# Altium PCB Power_981228.PcbDoc
Units mil, origin at the board's own origin, x right, y up, seen from the top; angles counter-clockwise.
Board outline 6000 x 4000 mil, 2 copper layers (Top Layer, Bottom Layer); 34 components, 31 nets, 135 pads, 0 vias.
Unrouted connection lines stored in the file: 59.
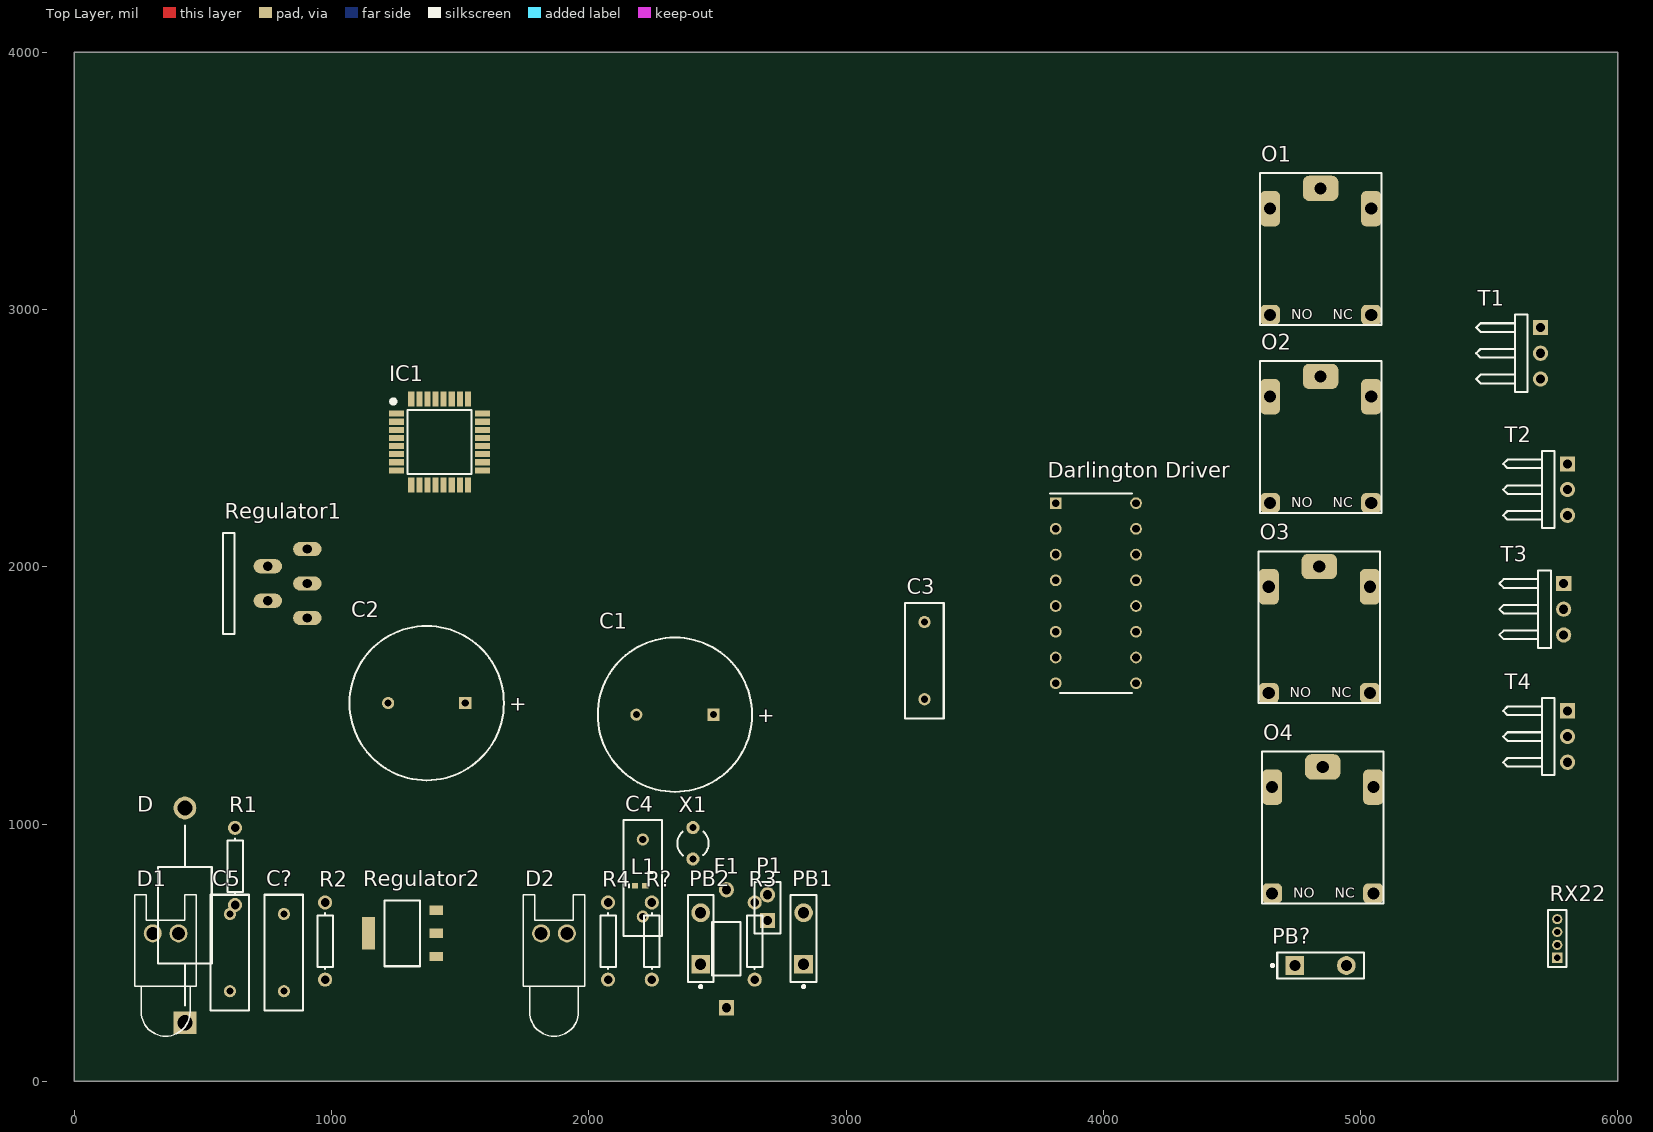
[diagram p0: Top Layer view]
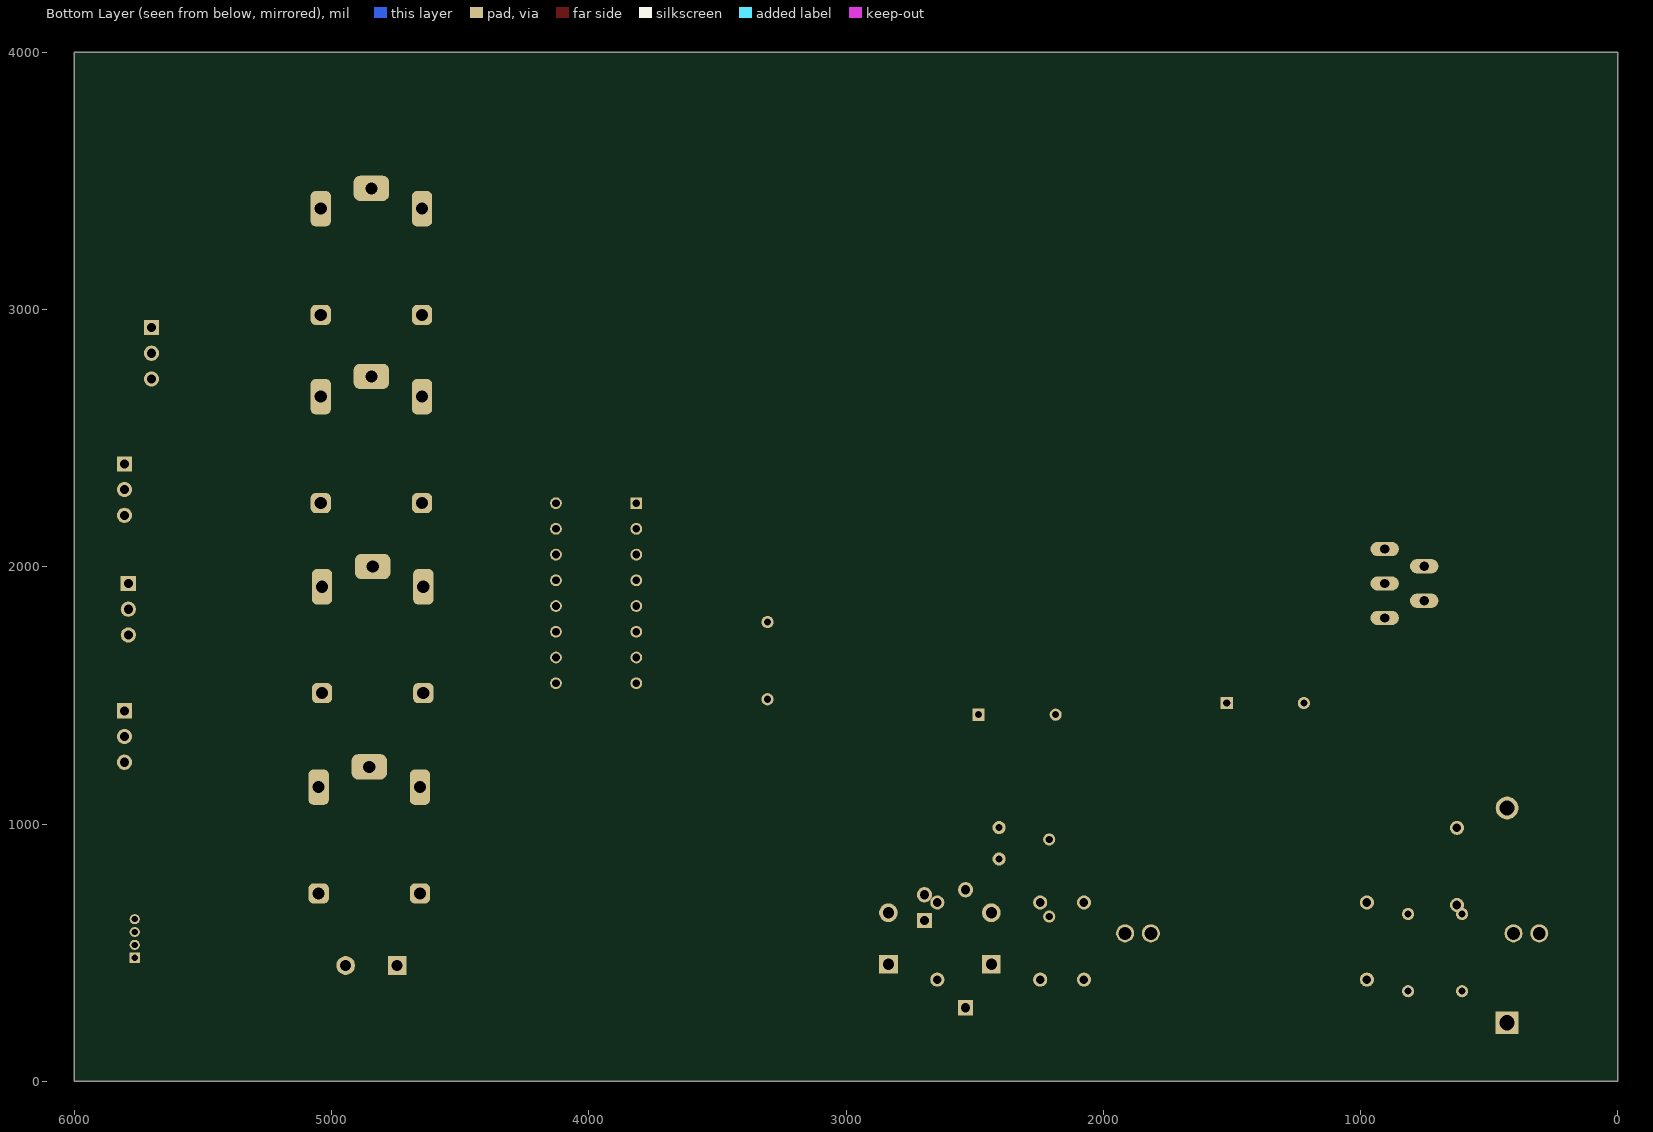
[diagram p1: Bottom Layer view, seen from below]

## Layer stack, top to bottom
Top Solder: solder mask 0.4, Solder Resist, Dk 3.5
Top Layer: signal copper 1.4
Dielectric 1: dielectric 12.6, FR-4, Dk 4.8
Bottom Layer: signal copper 1.4
Bottom Solder: solder mask 0.4, Solder Resist, Dk 3.5

## Board outline
0,0 6000,0 6000,4000 0,4000

## Design rules (kind name [scope] priority, off if disabled: settings)
Clearance [All] p1: gap=10 ignorepadtopadclearanceinfootprint=FALSE except(0: Arc-Hole Track-Hole SMDPad-Hole THPad-Hole Via-Hole Fill-Hole Poly-Hole Region-Hole Text-Hole)
PolygonConnect [All] p1: connectstyle=Relief reliefconductorwidth=10 reliefentries=4 polygonreliefangle="90 Angle" airgapwidth=10
RoomDefinition Power_981228 [InComponentClass('Power_981228')] p1: confinementstyle=ConfineIn formatcopy=TRUE lockcomponents=FALSE outline 6045,60 8575,60 8575,780 6045,780
RoutingVias [All] p1: holewidth=28 width=50 viastyle="Through Hole" minholewidth=28 minwidth=50 maxholewidth=28 maxwidth=50
SolderMaskExpansion [All] p1: expansion=4
Width [All] p1: maxlimit=10 minlimit=10 preferedwidth=10
30 further rules are at their usual default settings.

## Components (designator, comment, footprint, x,y, rotation, side; value= is the part's Value field where it differs from the comment)
C1 "Cap Pol1" RB7.6-15 2335,1425 r0 top value=100uF
C2 "Cap Pol1" RB7.6-15 1370,1470 r0 top value=1000uF
C3 "Cap" RAD-0.3 3305,1635 r90 top value=20pF
C4 "Cap" RAD-0.3 2210,790 r90 top value=20pF
C5 "Cap" RAD-0.3 605,500 r90 top value=10pF
C? "Cap" RAD-0.3 815,500 r90 top
D "1N5822" DIOAD2120W130L950D530P 430,645 r90 top
D1 "LED0" LED-0 355,575 r0 top
D2 "LED0" LED-0 1865,575 r0 top
"Darlington Driver" "ULN2003A" DIP794W56P254L1918H533Q16N 3971.3,1897.32 r0 top
F1 "Fuse 1" PIN-W2/E2.8 2535,515 r90 top
IC1 "STM8S903K3T6C" QFP80P900X900X160-32N 1420,2485 r0 top
L1 "Inductor" 0402-A 2200,760 r0 top value=100uH
O1 "12V SMALL" Relay_5_Small 4845,3225 r0 top
O2 "12V SMALL" Relay_5_Small 4845,2493.94 r0 top
O3 "12V SMALL" Relay_5_Small 4840,1755 r0 top
O4 "12V SMALL" Relay_5_Small 4853.15,976.06 r0 top
P1 "HeaderIn" HDR1X2 2695,625 r90 top
PB1 "SW-PB" SPST-2 2835,555 r90 top
PB2 "SW-PB" SPST-2 2435,555 r90 top
PB? "SW-PB" SPST-2 4845,450 r0 top
R1 "Res1" AXIAL-0.3 625,835 r90 top value=1K
R2 "Res1" AXIAL-0.3 975,545 r90 top value=1K
R3 "Res1" AXIAL-0.3 2645,545 r90 top value=10K
R4 "Res1" AXIAL-0.3 2075,545 r90 top value=10K
R? "Res1" AXIAL-0.3 2245,545 r90 top value=10K
Regulator1 "LM2576" TO220-5 575,1935 r90 top
Regulator2 "AMS1117-3.3" SOT229P700X180-4N 1275,575 r90 top
RX22 "MHDR1X4" MHDR1X4 5765,480 r90 top
T1 "Header 3H" HDR1X3H 5700,2930 r270 top (schematic designator T4)
T2 "Header 3H" HDR1X3H 5805,2400 r270 top (schematic designator T3)
T3 "Header 3H" HDR1X3H 5790,1935 r270 top (schematic designator T2)
T4 "Header 3H" HDR1X3H 5805,1440 r270 top (schematic designator T1)
X1 "8MHz" R38 2405,925 r0 top

## Footprints (in the part's own frame and the unit in brackets; to place one, negate y for a bottom-side part, rotate by r counter-clockwise, add the part's x,y. Pads: shape width x height; smd on the part's side, far side on the other; paste and mask are expansions set on the pad)
0402-A [mm] "Chip Inductor, Body 1.0x0.5mm, IPC High Density"
  rect 0.6x0.5 smd: 1(-0.5,0) 2(0.5,0)
  silkscreen extent -1.1,-0.15 -1.1,0.15, body extent -0.55,-0.3 0.55,0.3, height 0.55
AXIAL-0.3 [mm] "Axial Device, Thru-Hole; 2 Leads; 0.3 in Pin Spacing"
  round 1.4 hole 0.85: 1(-3.81,0) 2(3.81,0)
  silkscreen extent -2.77,-0.76 2.77,0.76
DIOAD2120W130L950D530P [mm]
  round 2.25 hole 1.5: A(10.6,0)
  rect 2.25x2.25 hole 1.5: C(-10.6,0)
  silkscreen extent -8.89,-2.65 8.89,2.65
DIP794W56P254L1918H533Q16N [mm]
  rect 1.16x1.16 hole 0.76: 1(-3.97,8.89)
  round 1.16 hole 0.76: 2(-3.97,6.35) 3(-3.97,3.81) 4(-3.97,1.27) 5(-3.97,-1.27) 6(-3.97,-3.81) 7(-3.97,-6.35) 8(-3.97,-8.89) 9(3.97,-8.89) 10(3.97,-6.35) 11(3.97,-3.81) 12(3.97,-1.27) 13(3.97,1.27) 14(3.97,3.81) 15(3.97,6.35) 16(3.97,8.89)
  silkscreen extent -4.55,-9.84 3.55,9.84, body extent -4.11,-9.59 4.11,9.59, height 5.33
HDR1X2 [mm] "Connector; Header; 2 Position"
  rect 1.5x1.5 hole 0.9: 1(0,0)
  round 1.5 hole 0.9: 2(2.54,0)
  silkscreen extent -1.27,-1.27 3.81,1.27
HDR1X3H [mm] "Connector; Header; 3 Position; Right Angle"
  rect 1.5x1.5 hole 0.9: 1(0,0)
  round 1.5 hole 0.9: 2(2.54,0) 3(5.08,0)
  silkscreen extent -1.27,-6.35 6.35,-1.27
LED-0 [mil] "LED; 2 Leads"
  round 70 hole 50: 1(50,0) 2(-50,0)
  silkscreen extent -120,-400 120,150
MHDR1X4 [mm] "Connector; Header; 4 Position"
  rect 1x1 hole 0.6: 1(0,0)
  round 1 hole 0.6: 2(1.27,0) 3(2.54,0) 4(3.81,0)
  silkscreen extent -0.9,-0.9 4.71,0.9
PIN-W2/E2.8 [mm] "Thru-Hole; 2 Leads"
  rect 1.5x1.5 hole 0.9: 1(-5.825,0)
  round 1.5 hole 0.9: 2(5.825,0)
  silkscreen extent -2.65,-1.4 2.65,1.4
QFP80P900X900X160-32N [mm]
  rect 1.475x0.6 smd: 1(-4.238,2.8) 2(-4.238,2) 3(-4.238,1.2) 4(-4.238,0.4) 5(-4.238,-0.4) 6(-4.238,-1.2) 7(-4.238,-2) 8(-4.238,-2.8) 17(4.238,-2.8) 18(4.238,-2) 19(4.238,-1.2) 20(4.238,-0.4) 21(4.238,0.4) 22(4.238,1.2) 23(4.238,2) 24(4.238,2.8)
  rect 0.6x1.475 smd: 9(-2.8,-4.238) 10(-2,-4.238) 11(-1.2,-4.238) 12(-0.4,-4.238) 13(0.4,-4.238) 14(1.2,-4.238) 15(2,-4.238) 16(2.8,-4.238) 25(2.8,4.238) 26(2,4.238) 27(1.2,4.238) 28(0.4,4.238) 29(-0.4,4.238) 30(-1.2,4.238) 31(-2,4.238) 32(-2.8,4.238)
  silkscreen extent -4.77,-3.15 3.15,4.2, body extent -4.5,-4.5 4.5,4.5, height 1.6
R38 [mm] "Crystal, Thru-Hole; 2 Leads; Body 3.1 x 8.2 mm (Dia.xH)"
  round 1.3 hole 0.7: 1(0,1.55) 2(0,-1.55)
  silkscreen extent -1.55,-1.19 1.55,1.17
RAD-0.3 [mm] "Radial Cap, Thru-Hole; 2 Leads; 0.3 in Pin Spacing"
  round 1.2 hole 0.7: 1(-3.81,0) 2(3.81,0)
  silkscreen extent -5.71,-1.91 5.71,1.91
RB7.6-15 [mm] "Polarized Capacitor (Radial); 2 Leads"
  rect 1.2x1.2 hole 0.7: 1(3.81,0)
  round 1.2 hole 0.7: 2(-3.81,0)
  silkscreen extent -7.62,-7.62 7.62,7.62
Relay_5_Small [mm]
  rrect50% 2x3.5 hole 1.2: 1(5,4.25) 2(-5,4.25)
  rrect50% 3.5x2.5 hole 1.2: Com(0,6.25)
  rrect50% 2x2 hole 1.2: NC(5,-6.25) NO(-5,-6.25)
  silkscreen extent -6,-7.25 6,7.75, body extent -6.13,-7.58 6.17,8.12, height 13.71
SOT229P700X180-4N [mm]
  rect 0.93x1.31 smd: 1(-2.285,-3.345) 2(0.005,-3.345) 3(2.295,-3.345)
  rect 3.24x1.31 smd: 4(0.005,3.345)
  silkscreen extent -3.25,-1.75 3.25,1.75
SPST-2 [mm] "Switch; 2 Leads"
  rect 1.85x1.85 hole 1.1: 1(-2.54,0)
  round 1.85 hole 1.1: 2(2.54,0)
  silkscreen extent -4.89,-1.27 4.28,1.27
TO220-5 [mm]
  oval 1.408x2.816 hole 0.9: 1(-3.4,-8.4) 2(-1.7,-4.5) 3(0,-8.4) 4(1.7,-4.5) 5(3.4,-8.4)
  silkscreen extent -5,-1.2 5,-0.1

## Part data
C1 C2: "Polarized Capacitor (Radial)", LatestRevisionDate=17-Jul-2002, LatestRevisionNote="Re-released for DXP Platform.", PackageDescription="Polarized Capacitor (Radial); 2 Leads", PackageReference=RB7.6-15, Published=8-Jun-2000, Publisher="Altium Limited"
C3 C4 C5 C?: "Capacitor", LatestRevisionDate=17-Jul-2002, LatestRevisionNote="Re-released for DXP Platform.", PackageDescription="Radial Cap, Thru-Hole; 2 Leads; 0.3 in Pin Spacing", PackageReference=RAD-0.3, Published=8-Jun-2000, Publisher="Altium Limited"
D: "Diode Schottky 40V 3A Through Hole", Package="DO-201AD-201 Panjit", Availability=Unavailable, MF="ON Semiconductor", MP=1N5822, Price=None, SnapEDA_Link=https://www.snapeda.com/parts/1N5822/ON%20Semiconductor/view-part/1356736/?ref=snap
D1 D2: "Typical INFRARED GaAs LED", LatestRevisionDate=08-Jul-2005, LatestRevisionNote="Mech Layer 1 removed.", PackageDescription="LED; 2 Leads", PackageReference=LED-0, Published=8-Jun-2000, Publisher="Altium Limited"
"Darlington Driver": "Integrated Circuit", Manufacturer_Name=STMicroelectronics, Mouser Part Number=511-ULN2003A, RS Part Number=6868209, Allied_Number=70014189, Allied Price/Stock=http://www.alliedelec.com/stmicroelectronics-uln2003a/70014189/, Datasheet Link=http://www.st.com/web/en/resource/technical/document/datasheet/CD00001244.pdf, Height=5.33mm, Manufacturer_Part_Number=ULN2003A, Mouser Price/Stock=https://www.mouser.com/Search/Refine.aspx?Keyword=511-ULN2003A, RS Price/Stock=http://uk.rs-online.com/web/p/products/6868209
F1: "Fuse", LatestRevisionDate=17-Jul-2002, LatestRevisionNote="Re-released for DXP Platform.", PackageDescription="Thru-Hole; 2 Leads", PackageReference=PIN-W2/E2.8, Published=8-Jun-2000, Publisher="Altium Limited"
IC1: "Integrated Circuit", Manufacturer_Name=STMicroelectronics, Mouser Part Number=511-STM8S903K3T6C, RS Part Number=7250025P, Allied_Number=70391238, Allied Price/Stock=http://www.alliedelec.com/stmicroelectronics-stm8s903k3t6c/70391238/, Datasheet Link=http://www.st.com/st-web-ui/static/active/en/resource/technical/document/datasheet/CD00231332.pdf, Height=1.6mm, Manufacturer_Part_Number=STM8S903K3T6C, Mouser Price/Stock=https://www.mouser.com/Search/Refine.aspx?Keyword=511-STM8S903K3T6C, RS Price/Stock=http://china.rs-online.com/web/p/products/7250025P
O1: library part HJR-78F-12VDC-S-Z, Case/Package=LQFP, Frequency=16MHz, Manufacturer=TIANBO, Manufacturer Part Number=STM8S003K3T6C, Max Operating Temperature=85°C, Max Power Dissipation=330mW, Max Supply Voltage=5.5V, Min Operating Temperature=-40°C, Min Supply Voltage=2.95V, Operating Temp="-40°C to +85°C", Package Quantity=250, Rating="7A, 120VAC", Storage Temp="-40°C to +105°C", ComponentLink2Description=http://www.st.com/web/en/resource/technical/document/datasheet/DM00024550.pdf?src-supplier=Future+Electronics, ComponentLink2URL=http://www.st.com/web/en/resource/technical/document/datasheet/DM00024550.pdf?src-supplier=Future+Electronics, ComponentLink3Description=http://www.st.com/web/en/resource/technical/document/datasheet/DM00024550.pdf?src-supplier=Avnet+Europe, ComponentLink3URL=http://www.st.com/web/en/resource/technical/document/datasheet/DM00024550.pdf?src-supplier=Avnet+Europe, ComponentLink4Description=http://www.st.com/web/en/resource/technical/document/datasheet/DM00024550.pdf?src-supplier=Mouser, ComponentLink4URL=http://www.st.com/web/en/resource/technical/document/datasheet/DM00024550.pdf?src-supplier=Mouser, Data Bus Width=8b, Data Rate=8Mbps, Height=1.45mm, Interface=I2C,SPI,IrDA,UART,USART,LIN, Lead Free="Lead Free", Length=7.2mm, Manufacture Part #=HJR-78F-12VDC-S-Z, Max Frequency=16MHz, Memory Size=8KB, Memory Type=FLASH, Mount="Surface Mount", Number of ADC Channels=5, Number of I2C Channels=1, Number of I/Os=28, Number of Pins=32, Number of Programmable I/O=28, Number of SPI Channels=1, Number of Timers/Counters=7, Number of UART Channels=1, Oscillator Type=Internal, Packaging=Tray, Peripherals="Brown-out Detect/Reset,POR,PWM,WDT,I2C", Radiation Hardening=No, RAM Size=1KB, REACH SVHC="No SVHC", Stock 1=0, Supplier 1="Future Electronics", Watchdog Timer=Yes, Width=7.2mm
O2 O3 O4: library part HJR-78F-12VDC-S-Z, Manufacturer=TIANBO, Operating Temp="-40°C to +85°C", Rating="7A, 120VAC", Storage Temp="-40°C to +105°C", Manufacture Part #=HJR-78F-12VDC-S-Z
P1: library part "Header 2", "Header, 2-Pin", LatestRevisionDate=17-Jul-2002, LatestRevisionNote="Re-released for DXP Platform.", Publisher="Altium Limited"
PB1 PB2 PB?: "Switch", LatestRevisionDate=17-Jul-2002, LatestRevisionNote="Re-released for DXP Platform.", PackageDescription="Switch; 2 Leads", PackageReference=SPST-2, Published=24-Mar-1999, Publisher="Altium Limited"
R1 R2 R3 R4 R?: "Resistor", LatestRevisionDate=17-Jul-2002, LatestRevisionNote="Re-released for DXP Platform.", PackageDescription="Axial Device, Thru-Hole; 2 Leads; 0.3 in Pin Spacing", PackageReference=AXIAL-0.3, Published=8-Jun-2000, Publisher="Altium Limited"
Regulator1: "Buck Switching Regulator IC Positive Fixed 5V 1 Output 3A TO-263-6, D²Pak _5 Leads + Tab_, TO-263BA", Package="TO-263-6 National Semiconductor", Availability=Unavailable, MF="Texas Instruments", MP=LM2576, Price=None, SnapEDA_Link=https://www.snapeda.com/parts/LM2576/Texas%20Instruments/view-part/214937/?ref=snap
Regulator2: library part AMS1117, "Low-dropout regulator", Type=AMS1117-3.3
RX22: "Header, 4-Pin", LatestRevisionDate=17-Jul-2002, LatestRevisionNote="Re-released for DXP Platform.", Publisher="Altium Limited"
T1 T2 T3 T4: "Header, 3-Pin, Right Angle", LatestRevisionDate=17-Jul-2002, LatestRevisionNote="Re-released for DXP Platform.", Publisher="Altium Limited"
X1: library part XTAL, "Crystal Oscillator", LatestRevisionDate=17-Jul-2002, LatestRevisionNote="Re-released for DXP Platform.", PackageDescription="Crystal, Thru-Hole; 2 Leads; Body 3.1 x 8.2 mm (Dia.xH)", PackageReference=R38, Published=8-Jun-2000, Publisher="Altium Limited"
L1: Code_IEC=1005, Code_JEITA=0402, LatestRevisionDate=29-May-2009, LatestRevisionNote="IPC-7351 Footprint Added.", PackageDescription="Chip Inductor", PackageReference=0402-A, Published=8-Jun-2000, Publisher="Altium Limited"

## Nets (pads, with @x,y where several pads share a name; then routed paths per layer and width w, separated by ;. In a path a pad name is that pad's centre, name@x,y a point inside that pad or via, vN(x,y) a via of type N, cw(c..) or ccw(c..) an arc to the next point about the centre after c; other vN are vias at no path point)
1: R?.1
3.3V: IC1.6 PB1.2 PB2.2 PB?.2
5V: "Darlington Driver.9" C2.1 L1.2 O1.1 O2.1 O3.1 O4.1 R1.1 Regulator1.4 Regulator2.3 RX22.4
12V: C1.1 F1.1 P1.2
GND: "Darlington Driver.8" C1.2 C2.2 C3.1 C4.1 C5.2 D1.2 D2.2 D.A IC1.4 P1.1 Regulator1.3 Regulator1.5 Regulator2.1 RX22.1
NetC3_2: C3.2 C4.2 IC1.2 IC1.3 X1.1 X1.2
NetD1_1: D1.1 R1.2
NetD_C: D.C L1.1 Regulator1.2
"NetDarlington Driver_13": "Darlington Driver.13" O4.2
"NetDarlington Driver_14": "Darlington Driver.14" O3.2
"NetDarlington Driver_15": "Darlington Driver.15" O2.2
"NetDarlington Driver_16": "Darlington Driver.16" O1.2
NetF1_2: F1.2 Regulator1.1
NetO3_COM: O3.Com T2.2
NetO3_NC: O3.NC T2.1
NetO3_NO: O3.NO T2.3
NetO4_COM: O4.Com T1.2
NetO4_NC: O4.NC T1.1
NetO4_NO: O4.NO T1.3
NetPB1_1: PB1.1 R3.2
NetPB2_1: PB2.1 R4.2
NetPB?_1: PB?.1 R?.2
NRST: IC1.1
RL1: "Darlington Driver.1" IC1.12
RL2: "Darlington Driver.2" IC1.11
RL3: "Darlington Driver.3" IC1.10
RL4: "Darlington Driver.4" IC1.9
SW01: IC1.16 R3.1
SW02: IC1.15 R4.1
SWIM: IC1.26
VCC: C5.1 R2.1 Regulator2.2
pads on no net: "Darlington Driver.5" "Darlington Driver.6" "Darlington Driver.7" "Darlington Driver.10" "Darlington Driver.11" "Darlington Driver.12" C?.1 C?.2 D2.1 IC1.5 IC1.7 IC1.8 IC1.13 IC1.14 IC1.17 IC1.18 IC1.19 IC1.20 IC1.21 IC1.22 IC1.23 IC1.24 IC1.25 IC1.27 IC1.28 IC1.29 IC1.30 IC1.31 IC1.32 O1.Com O1.NC O1.NO O2.Com O2.NC O2.NO R2.2 Regulator2.4 RX22.2 RX22.3 T3.1 T3.2 T3.3 T4.1 T4.2 T4.3

## Text inside footprints (layer, text, board x,y; h text height)
C1: Top Overlay "+" at 2655.15,1395.99 h59.06
C2: Top Overlay "+" at 1690.15,1440.99 h59.06
O1: Top Overlay "NO" at 4731,2962 h39.37; Top Overlay "NC" at 4892,2962 h39.37
O2: Top Overlay "NO" at 4731,2230.94 h39.37; Top Overlay "NC" at 4892,2230.94 h39.37
O3: Top Overlay "NO" at 4726,1492 h39.37; Top Overlay "NC" at 4887,1492 h39.37
O4: Top Overlay "NO" at 4739.15,713.06 h39.37; Top Overlay "NC" at 4900.15,713.06 h39.37